# Altium PCB PCB1.PcbDoc
Units mil, origin at the board's own origin, x right, y up, seen from the top; angles counter-clockwise.
Board outline 6000 x 4000 mil, 4 copper layers (Signal 1, GND 1, GND 2, Signal 2), stack 23.756 mil thick; 31 components, 12 nets, 164 pads, 0 vias.
Unrouted connection lines stored in the file: 74.
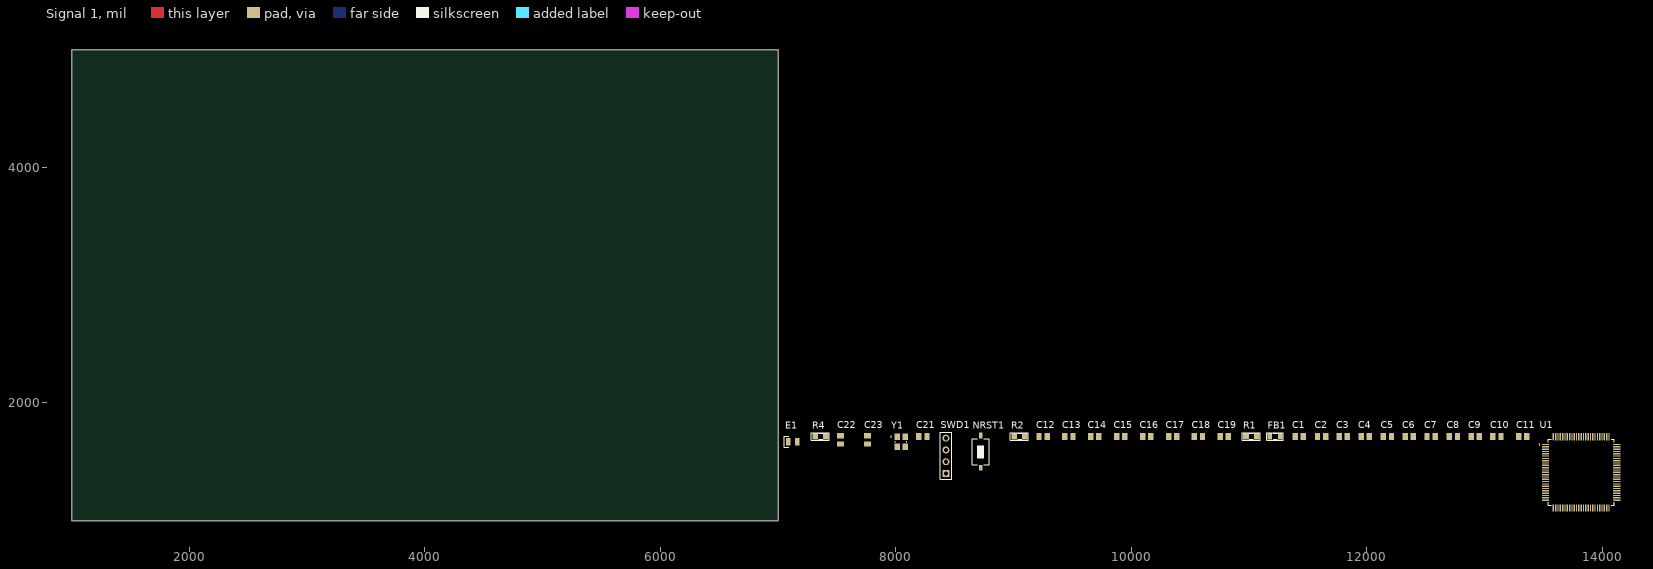
[diagram p0: Signal 1 view]
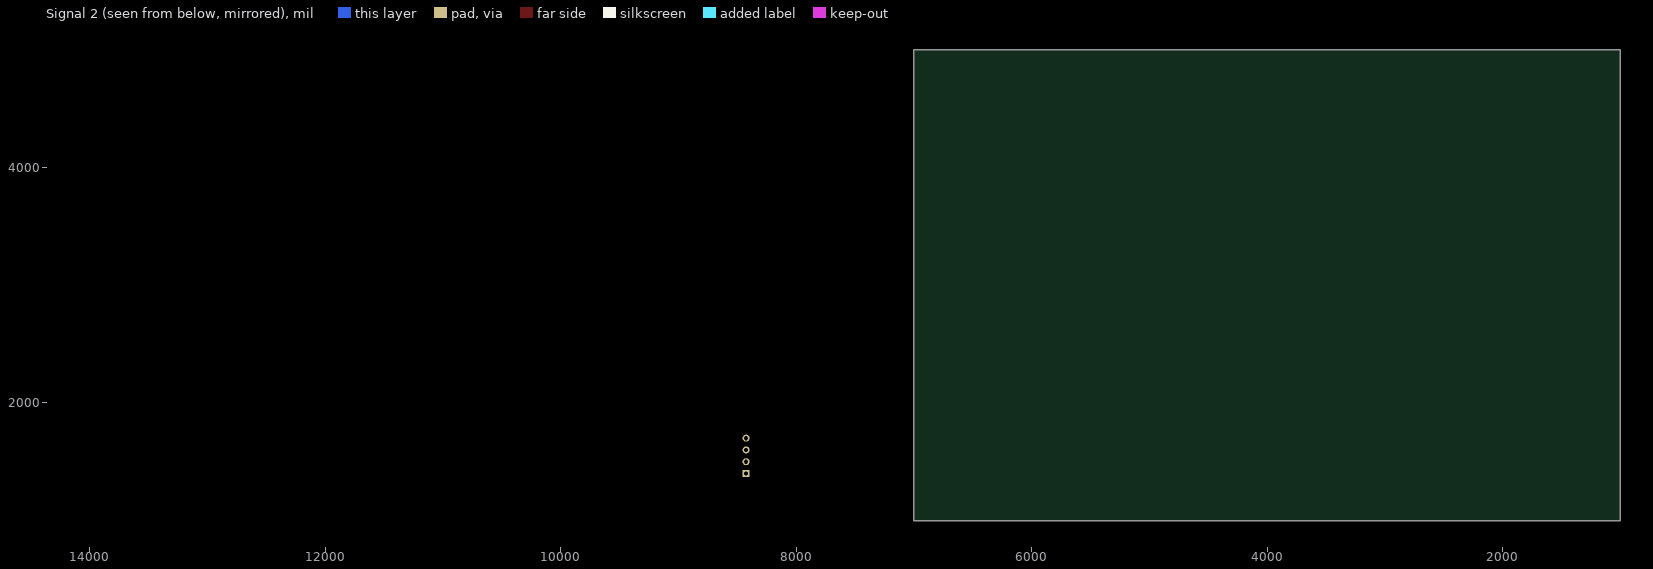
[diagram p1: Signal 2 view, seen from below]
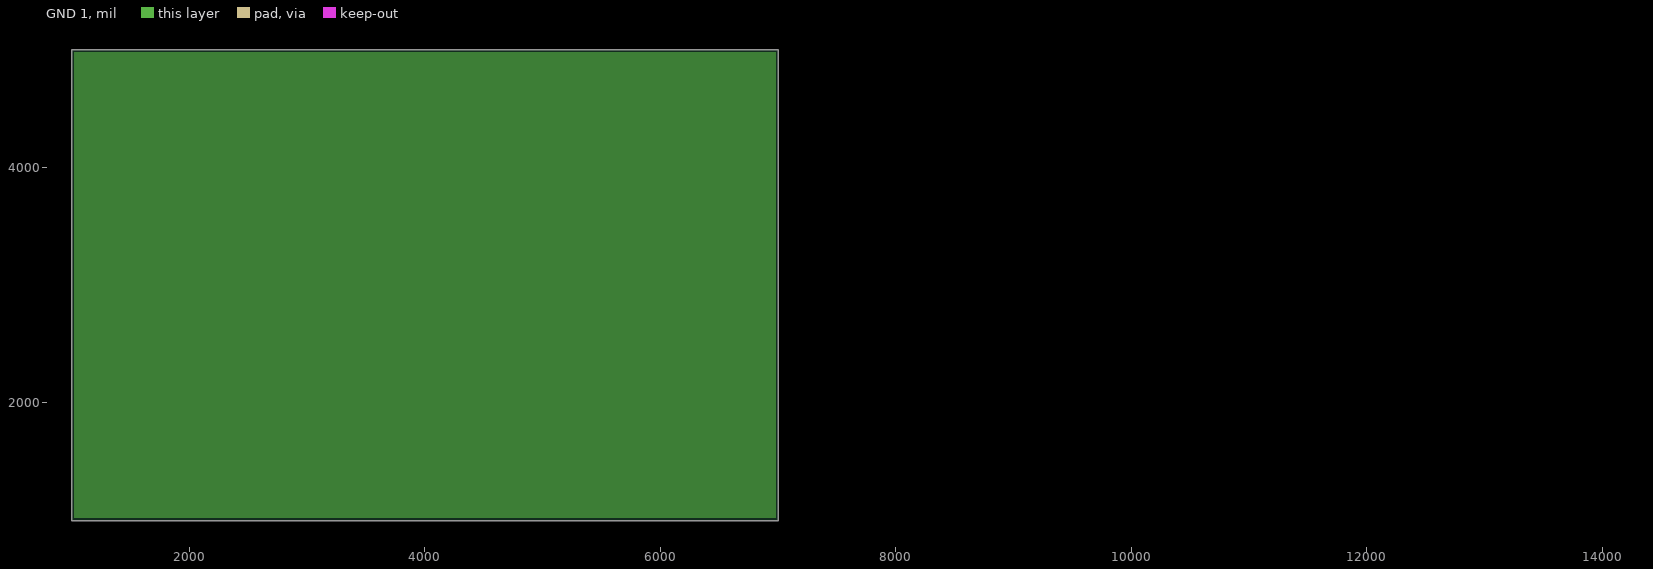
[diagram p2: GND 1, clearances drawn from the general rule]
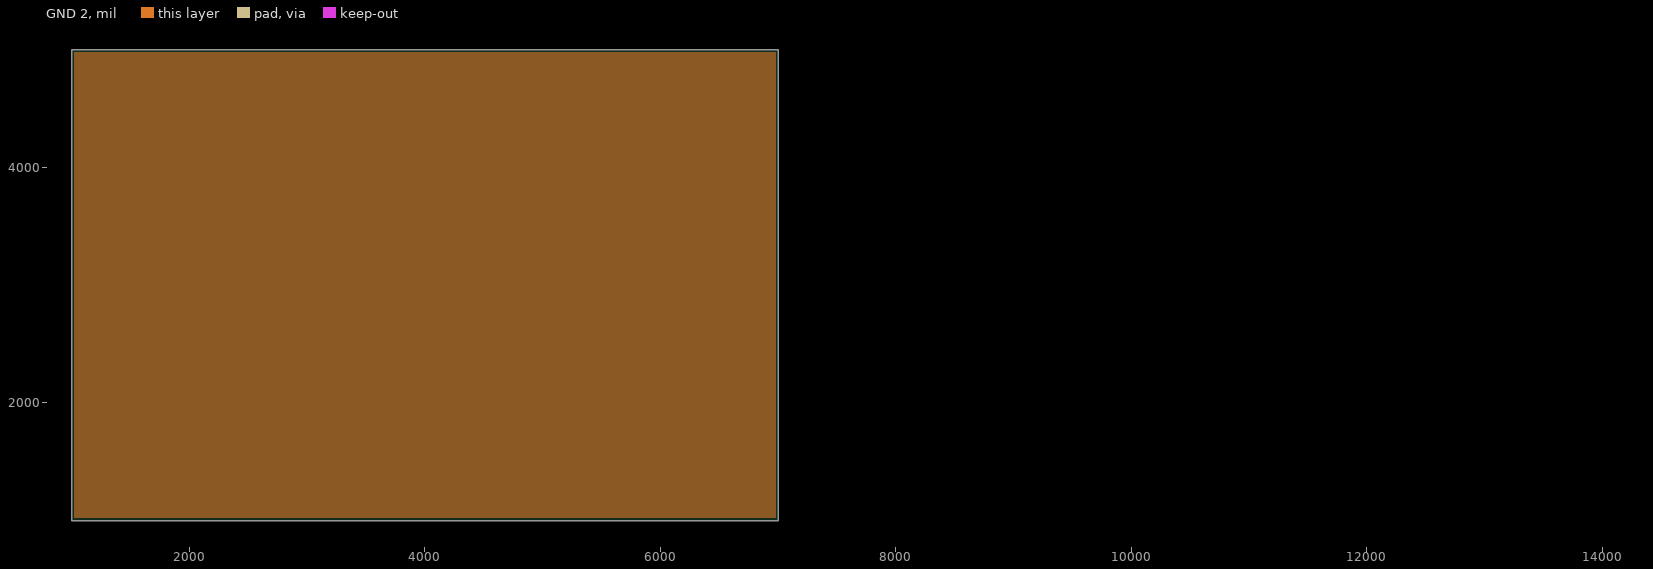
[diagram p3: GND 2, clearances drawn from the general rule]

## Layer stack, top to bottom
Top Solder: solder mask 0.4, Solder Resist, Dk 3.5
Signal 1: signal copper 1.378
Dielectric 2: prepreg 2.8, PP-006, Dk 4.1
GND 1: plane copper 1.4
Dielectric 1: dielectric 12.6, FR-4, Dk 4.8
GND 2: plane copper 1.4
Dielectric 3: prepreg 2.8, PP-006, Dk 4.1
Signal 2: signal copper 1.378
Bottom Solder: solder mask 0.4, Solder Resist, Dk 3.5

## Board outline
1000,1000 7000,1000 7000,5000 1000,5000

## Design rules (kind name [scope] priority, off if disabled: settings)
Clearance [All] p1: gap=10 ignorepadtopadclearanceinfootprint=TRUE except(5: SMDPad-SMDPad)
PlaneClearance [All] p1: clearance=20
PlaneConnect [All] p1: planeconnectstyle=Relief reliefexpansion=20 reliefentries=4 reliefconductorwidth=10 reliefairgap=10
PolygonConnect [All] p1: connectstyle=Relief reliefconductorwidth=10 reliefentries=4 polygonreliefangle="90 Angle" airgapwidth=10
RoutingVias [All] p1: holewidth=28 width=50 viastyle="Through Hole" minholewidth=28 minwidth=50 maxholewidth=28 maxwidth=50
SolderMaskExpansion [All] p1: expansion=4 istentingtop=FALSE
Width [All] p1: maxlimit=10 minlimit=10 preferedwidth=10
28 further rules are at their usual default settings.

## Components (designator, comment, footprint, x,y, rotation, side; value= is the part's Value field where it differs from the comment)
C1 "100nF" CAPC2012X145N 11425,1715 r0 top
C2 "100nF" CAPC2012X145N 11615,1715 r0 top
C3 "100nF" CAPC2012X145N 11800,1715 r0 top
C4 "100nF" CAPC2012X145N 11985,1715 r0 top
C5 "100nF" CAPC2012X145N 12175,1715 r0 top
C6 "100nF" CAPC2012X145N 12360,1715 r0 top
C7 "100nF" CAPC2012X145N 12545,1715 r0 top
C8 "100nF" CAPC2012X145N 12735,1715 r0 top
C9 "100nF" CAPC2012X145N 12920,1715 r0 top
C10 "100nF" CAPC2012X145N 13105,1715 r0 top
C11 "4.7uF" CAPC2012X145N 13325,1715 r0 top
C12 "2.2uF" CAPC2012X145N 9250,1715 r0 top
C13 "2.2uF" CAPC2012X145N 9470,1715 r0 top
C14 "100nF" CAPC2012X145N 9690,1715 r0 top
C15 "1uF" CAPC2012X145N 9910,1715 r0 top
C16 "100nF" CAPC2012X145N 10130,1715 r0 top
C17 "1uF" CAPC2012X145N 10350,1715 r0 top
C18 "100nF" CAPC2012X145N 10570,1715 r0 top
C19 "100nF" CAPC2012X145N 10790,1715 r0 top
C21 "100nF" CAPC2012X145N 8230,1715 r0 top
C22 "10pF" CAPC2012X145N 7530,1685 r90 top
C23 "10pF" CAPC2012X145N 7760,1685 r90 top
E1 "BLUE" LED_0805_BLUE 7125,1670 r0 top
FB1 "Ferrit Bead" RES-SMD-0805 11220,1715 r0 top
NRST1 "SW-SMD" SW-SMD 8720,1585 r90 top
R1 "47" SM-0805 11020,1715 r0 top value=1K
R2 "10K" SM-0805 9050,1715 r0 top value=1K
R4 "1K" SM-0805 7360,1715 r0 top
SWD1 "Header 4" HDR1X4 8425,1400 r90 top
U1 "STM32H743VIT6" QFP50P1600X1600X160-100N 13820,1410 r0 top
Y1 "25MHz" XTAL_ABM8G-25.000MHZ-B4Y-T 8045,1670 r0 top

## Footprints (in the part's own frame and the unit in brackets; to place one, negate y for a bottom-side part, rotate by r counter-clockwise, add the part's x,y. Pads: shape width x height; smd on the part's side, far side on the other; paste and mask are expansions set on the pad)
CAPC2012X145N [mm]
  rect 1.17x1.47 smd: 1(-0.871,0) 2(0.871,0)
  body extent -1,-0.63 1,0.63, height 1.45
HDR1X4 [mm] "Connector; Header; 4 Position"
  rect 1.5x1.5 hole 0.9: 1(0,0)
  round 1.5 hole 0.9: 2(2.54,0) 3(5.08,0) 4(7.62,0)
  silkscreen extent -1.27,-1.27 8.89,1.27, body extent -1.27,-1.27 8.89,1.27, height 7
LED_0805_BLUE [mm]
  rrect25% 1x1.7 smd: A(0.95,0) K(-0.95,0)
  silkscreen extent -1.8,-1.2 -0.9,1.2, body extent -1,-0.63 1,0.63, height 1.12
QFP50P1600X1600X160-100N [mm]
  rrect50% 1.56x0.28 smd: 1(-7.68,6) 2(-7.68,5.5) 3(-7.68,5) 4(-7.68,4.5) 5(-7.68,4) 6(-7.68,3.5) 7(-7.68,3) 8(-7.68,2.5) 9(-7.68,2) 10(-7.68,1.5) 11(-7.68,1) 12(-7.68,0.5) 13(-7.68,0) 14(-7.68,-0.5) 15(-7.68,-1) 16(-7.68,-1.5) 17(-7.68,-2) 18(-7.68,-2.5) 19(-7.68,-3) 20(-7.68,-3.5) 21(-7.68,-4) 22(-7.68,-4.5) 23(-7.68,-5) 24(-7.68,-5.5) 25(-7.68,-6) 51(7.68,-6) 52(7.68,-5.5) 53(7.68,-5) 54(7.68,-4.5) 55(7.68,-4) 56(7.68,-3.5) 57(7.68,-3) 58(7.68,-2.5) 59(7.68,-2) 60(7.68,-1.5) 61(7.68,-1) 62(7.68,-0.5) 63(7.68,0) 64(7.68,0.5) 65(7.68,1) 66(7.68,1.5) 67(7.68,2) 68(7.68,2.5) 69(7.68,3) 70(7.68,3.5) 71(7.68,4) 72(7.68,4.5) 73(7.68,5) 74(7.68,5.5) 75(7.68,6)
  rrect50% 0.28x1.56 smd: 26(-6,-7.68) 27(-5.5,-7.68) 28(-5,-7.68) 29(-4.5,-7.68) 30(-4,-7.68) 31(-3.5,-7.68) 32(-3,-7.68) 33(-2.5,-7.68) 34(-2,-7.68) 35(-1.5,-7.68) 36(-1,-7.68) 37(-0.5,-7.68) 38(0,-7.68) 39(0.5,-7.68) 40(1,-7.68) 41(1.5,-7.68) 42(2,-7.68) 43(2.5,-7.68) 44(3,-7.68) 45(3.5,-7.68) 46(4,-7.68) 47(4.5,-7.68) 48(5,-7.68) 49(5.5,-7.68) 50(6,-7.68) 76(6,7.68) 77(5.5,7.68) 78(5,7.68) 79(4.5,7.68) 80(4,7.68) 81(3.5,7.68) 82(3,7.68) 83(2.5,7.68) 84(2,7.68) 85(1.5,7.68) 86(1,7.68) 87(0.5,7.68) 88(0,7.68) 89(-0.5,7.68) 90(-1,7.68) 91(-1.5,7.68) 92(-2,7.68) 93(-2.5,7.68) 94(-3,7.68) 95(-3.5,7.68) 96(-4,7.68) 97(-4.5,7.68) 98(-5,7.68) 99(-5.5,7.68) 100(-6,7.68)
  silkscreen extent -9.1,-7.1 7.1,7.1, body extent -8,-8 8,8, height 1.6
RES-SMD-0805 [mil]
  rect 39.37x55 smd: 1(-45,0) 2(45,0)
  silkscreen extent -70,-34 70,33, body extent -39,-25 39,25, height 31
SM-0805 [mil] "Compoment SMD 80x50mil"
  rect 50x55 smd: 1(-45,0) 2(45,0)
  silkscreen extent -77,-34 76,33, body extent -40,-27 40,23, height 24
SW-SMD [mm] "Switch SMD type"
  rect 1.2x0.8 smd: 1(-3.5,0) 2(3.5,0)
  silkscreen extent -2.82,-1.85 2.82,1.85, body extent -3.05,-1.85 3.05,1.85, height 2.5
XTAL_ABM8G-25.000MHZ-B4Y-T [mm]
  rect 1.2x1.4 smd: 1(-0.85,1.1) 2(-0.85,-1.1) 3(0.85,-1.1) 4(0.85,1.1)
  silkscreen extent -2.3,-0.08 1.25,1.2, body extent -1.6,-1.24 1.6,1.24, height 0.99

## Part data
C1 C2 C3 C4 C5 C6 C7 C8 C9 C10 C12 C13 C14 C15 C16 C17 C18 C19 C21 C22 C23: library part VJ0805A390GXCAP, "39 pF Â±2% 200V Ceramic Capacitor C0G, NP0 0805 (2012 Metric)", Package="2012 Vishay Vitramon", Check_prices=https://www.snapeda.com/parts/VJ0805A390GXCAP/Vishay/view-part/?ref=eda, MF="Vishay Vitramon", MP=VJ0805A390GXCAP, SnapEDA_Link=https://www.snapeda.com/parts/VJ0805A390GXCAP/Vishay/view-part/?ref=snap
C11: library part CAP_TAN_SMD, "Polazied Tantalum Capacitor"
E1: library part LED_0805_BLUE, "LED 0805 BLUE SMD"
FB1: "Generic Ferrit Bead"
NRST1: "Switch", LatestRevisionDate=17-Jul-2002, LatestRevisionNote="Re-released for DXP Platform.", PackageReference=SPST-2, Published=24-Mar-1999, Publisher="Altium Limited"
R1 R2 R4: library part RM, "Resistor SMD"
SWD1: "Header, 4-Pin", LatestRevisionDate=17-Jul-2002, LatestRevisionNote="Re-released for DXP Platform.", Publisher="Altium Limited"
U1: "ARMÂ® CortexÂ®-M7 STM32H7 Microcontroller IC 32-Bit Single-Core 480MHz 2MB (2M x 8) FLASH 100-LQFP (14x14)", Package="LQFP-100 STMicroelectronics", Check_prices=https://www.snapeda.com/parts/STM32H743VIT6/STMicroelectronics/view-part/?ref=eda, MF=STMicroelectronics, MP=STM32H743VIT6, SnapEDA_Link=https://www.snapeda.com/parts/STM32H743VIT6/STMicroelectronics/view-part/?ref=snap
Y1: library part ABM8G-25.000MHZ-B4Y-T, "25 MHz Â±30ppm Crystal 10pF 60 Ohms 4-SMD, No Lead", Package="SMD-4 Abracon", Availability="In Stock", Check_prices=https://www.snapeda.com/parts/ABM8G-25.000MHZ-B4Y-T/Abracon+LLC/view-part/?ref=eda, MF=Abracon, MP=ABM8G-25.000MHZ-B4Y-T, Price=None, Purchase-URL=https://pricing.snapeda.com/search/part/ABM8G-25.000MHZ-B4Y-T/?ref=eda, SnapEDA_Link=https://www.snapeda.com/parts/ABM8G-25.000MHZ-B4Y-T/Abracon+LLC/view-part/?ref=snap

## Nets (pads, with @x,y where several pads share a name; then routed paths per layer and width w, separated by ;. In a path a pad name is that pad's centre, name@x,y a point inside that pad or via, vN(x,y) a via of type N, cw(c..) or ccw(c..) an arc to the next point about the centre after c; other vN are vias at no path point)
+3V3: C1.2 C2.2 C3.2 C4.2 C5.2 C6.2 C7.2 C8.2 C9.2 C10.2 C11.2 C19.2 FB1.2 R2.2 R4.1 SWD1.1 U1.6 U1.11 U1.27 U1.50 U1.75 U1.100
GND: C1.1 C2.1 C3.1 C4.1 C5.1 C6.1 C7.1 C8.1 C9.1 C10.1 C11.1 C12.1 C13.1 C14.1 C15.1 C16.1 C17.1 C18.1 C19.1 C21.1 C22.1 C23.1 NRST1.2 SWD1.4 U1.10 U1.19 U1.26 U1.49 U1.74 U1.99 Y1.2 Y1.4
HSE_IN: C22.2 U1.12 Y1.1
HSE_OUT: C23.2 U1.13 Y1.3
LED: E1.K U1.45
NetE1_A: E1.A R4.2
NRST: C21.2 NRST1.1 R2.1 U1.14
SWCLK: SWD1.2 U1.76
SWDIO: SWD1.3 U1.72
VCAP: C12.2 C13.2 U1.48 U1.73
VDDA: C16.2 C17.2 C18.2 FB1.1 R1.2 U1.21
VREF: C14.2 C15.2 R1.1 U1.20
pads on no net: U1.1 U1.2 U1.3 U1.4 U1.5 U1.7 U1.8 U1.9 U1.15 U1.16 U1.17 U1.18 U1.22 U1.23 U1.24 U1.25 U1.28 U1.29 U1.30 U1.31 U1.32 U1.33 U1.34 U1.35 U1.36 U1.37 U1.38 U1.39 U1.40 U1.41 U1.42 U1.43 U1.44 U1.46 U1.47 U1.51 U1.52 U1.53 U1.54 U1.55 U1.56 U1.57 U1.58 U1.59 U1.60 U1.61 U1.62 U1.63 U1.64 U1.65 U1.66 U1.67 U1.68 U1.69 U1.70 U1.71 U1.77 U1.78 U1.79 U1.80 U1.81 U1.82 U1.83 U1.84 U1.85 U1.86 U1.87 U1.88 U1.89 U1.90 U1.91 U1.92 U1.93 U1.94 U1.95 U1.96 U1.97 U1.98

## Polygon pours and split planes (outlines as drawn)
no net on GND 1 (split plane): 6979.9,1020.1 1020.1,1020.1 1020.1,4979.9 6979.9,4979.9
no net on GND 2 (split plane): 6979.9,1020.1 1020.1,1020.1 1020.1,4979.9 6979.9,4979.9

## Text inside footprints (layer, text, board x,y; h text height)
E1: Mechanical 13 "+" at 7194.56,1709.38 h39.37